# Altium PCB usbmodule.PcbDoc
Units mm, origin at the board's own origin, x right, y up, seen from the top; angles counter-clockwise.
Board outline 51.5 x 52.77 mm, 2 copper layers (Top Layer, Bottom Layer); 40 components, 39 nets, 247 pads, 56 vias.
Unrouted connection lines stored in the file: 72.
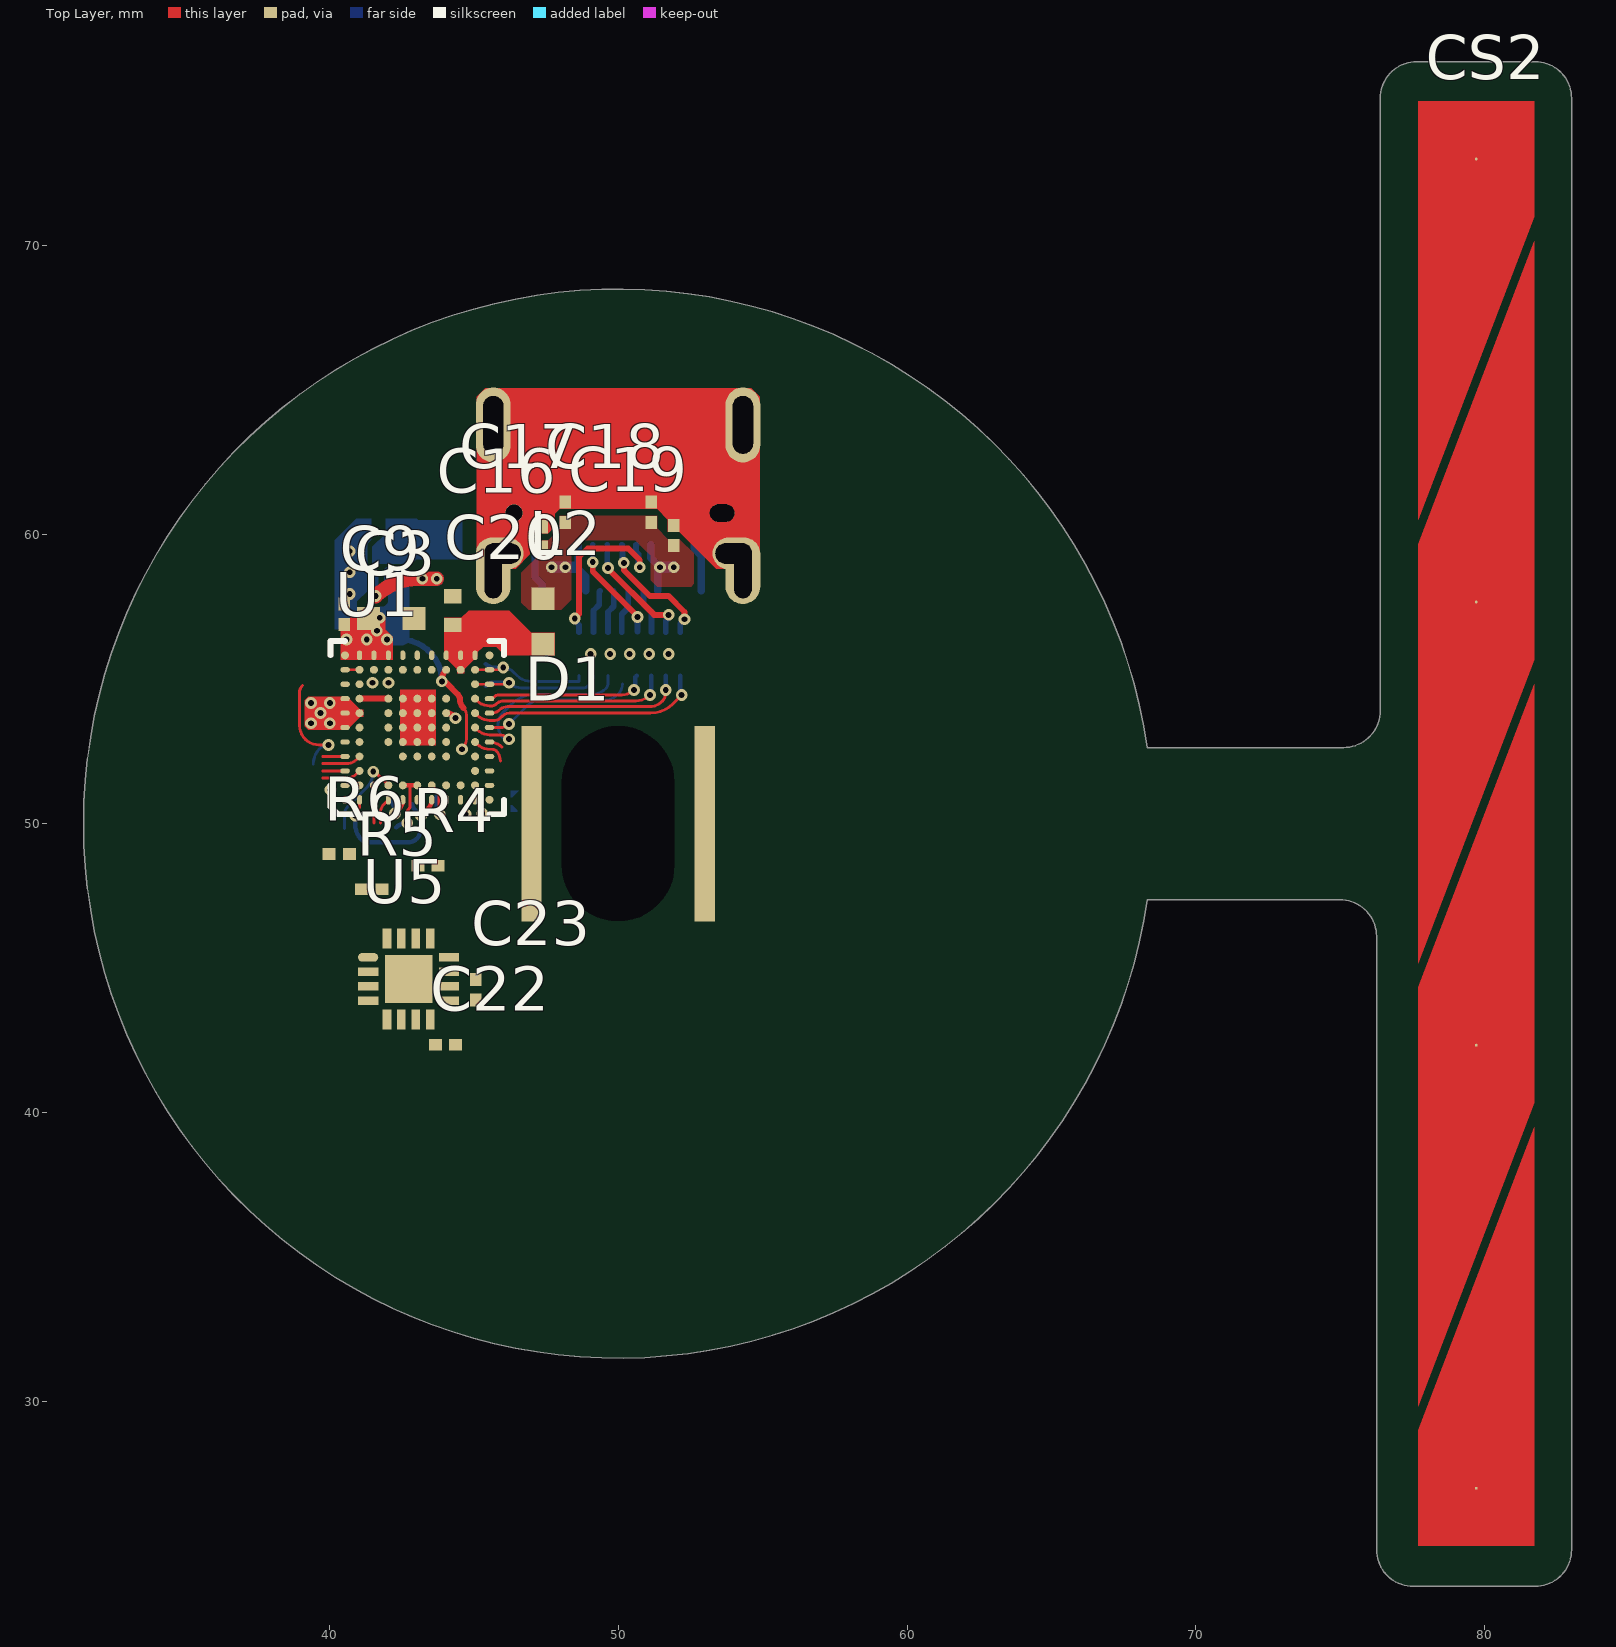
[diagram p0: Top Layer view]
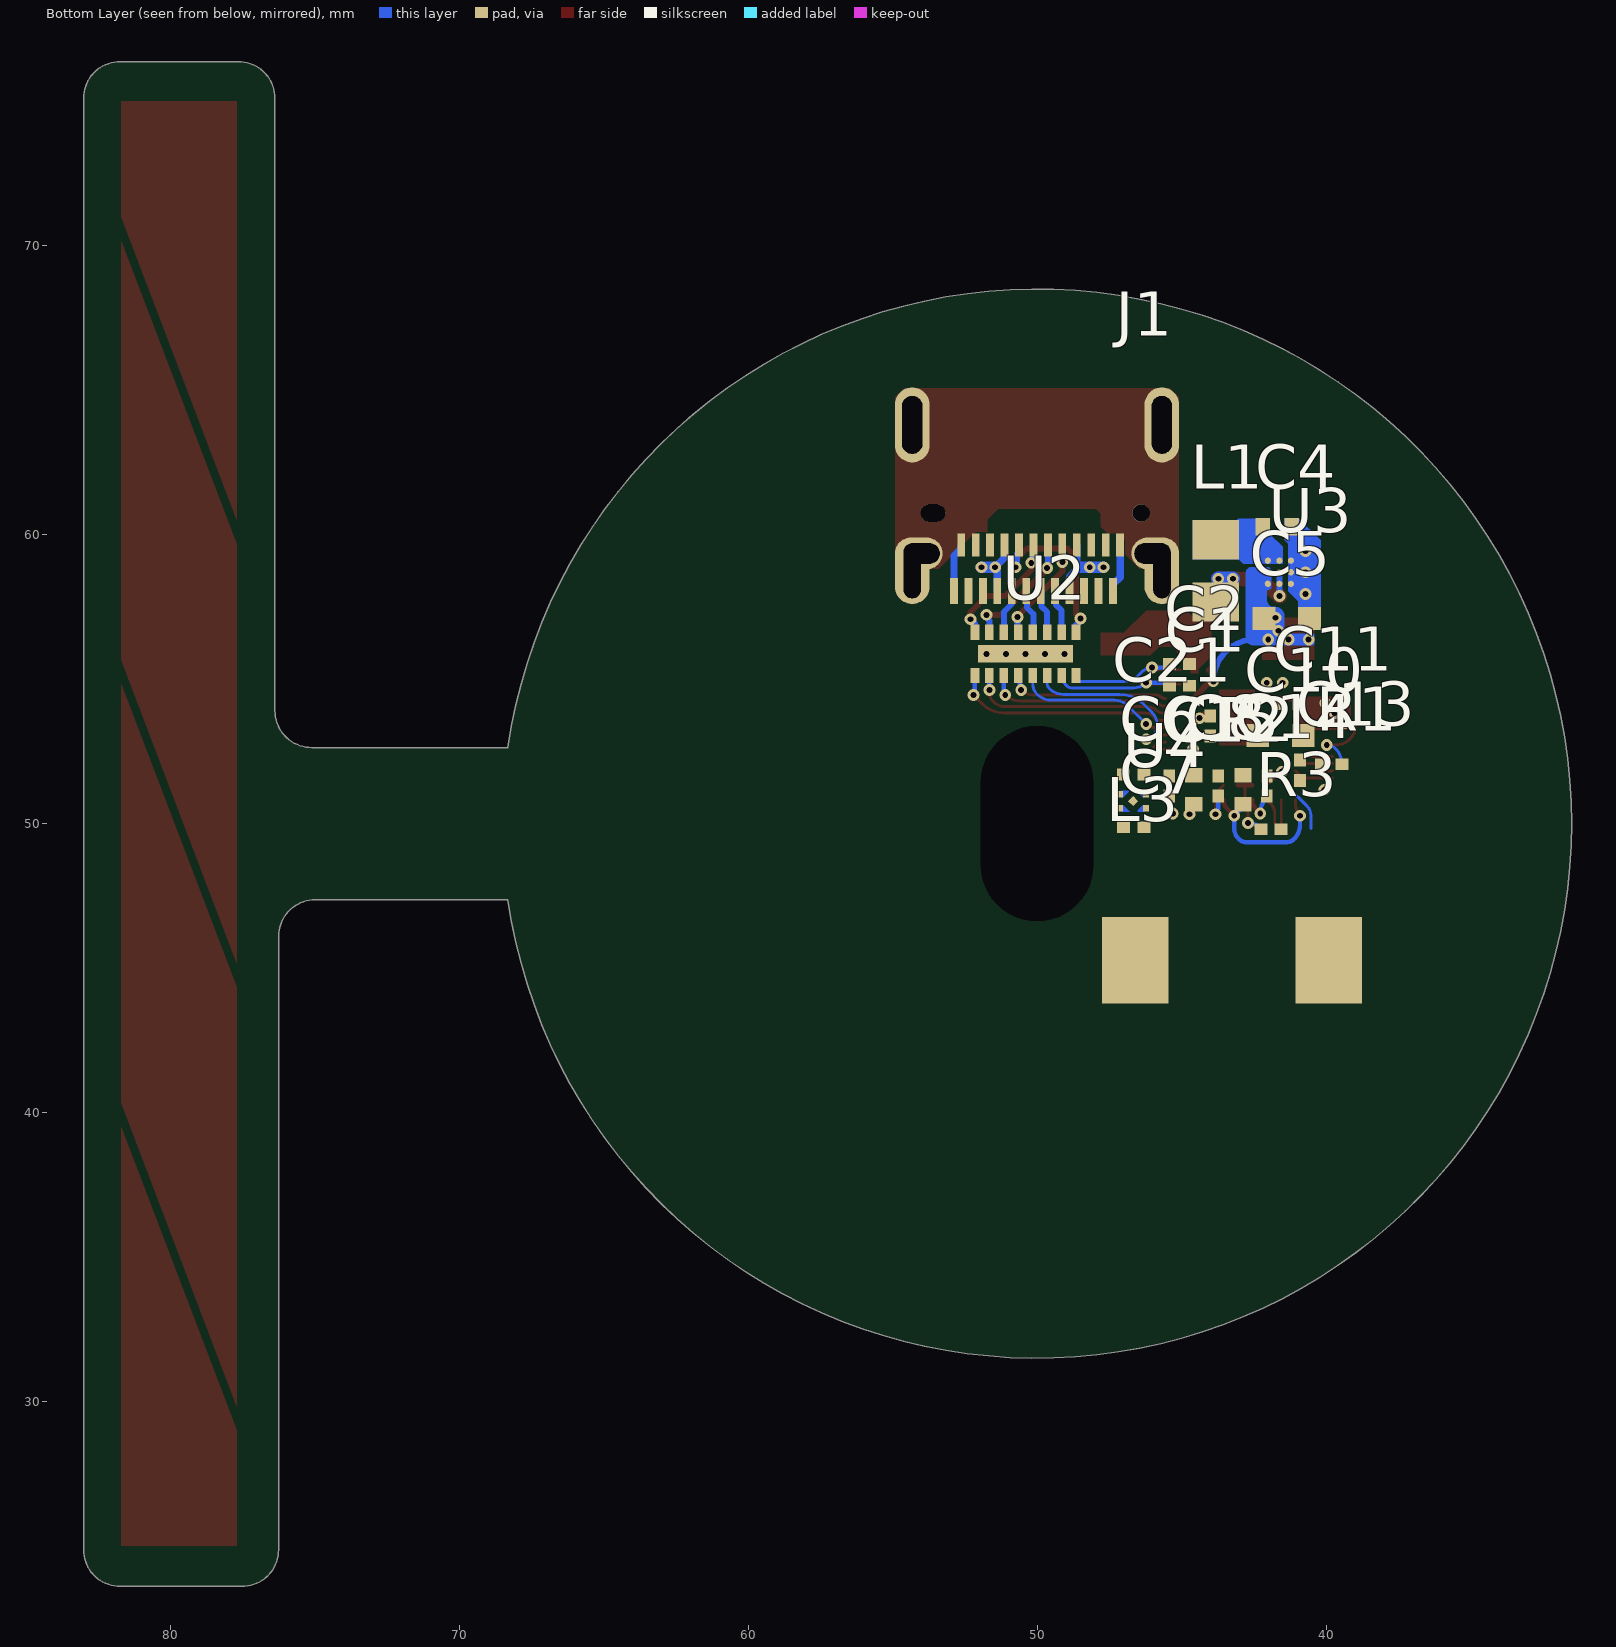
[diagram p1: Bottom Layer view, seen from below]

## Layer stack, top to bottom
Top Solder: solder mask 0.0102, Solder Resist, Dk 3.5
Top Layer: signal copper 0.0356
Dielectric1: dielectric 0.32, FR-4, Dk 4.8
Bottom Layer: signal copper 0.0356
Bottom Solder: solder mask 0.0102, Solder Resist, Dk 3.5

## Board outline
68.312,47.367 cw(c50,50) 68.312,52.633 68.323,52.635 75.105,52.635 ccw(c75.105,53.905) 76.375,53.905 76.375,75.105 cw(c77.645,75.105) 77.645,76.375 81.73,76.375 cw(c81.73,75.105) 83,75.105 83,24.87 cw(c81.73,24.87) 81.73,23.6 77.52,23.6 cw(c77.52,24.87) 76.25,24.87 76.25,46.095 ccw(c74.98,46.095) 74.98,47.365
board region main: 68.495,47.365 68.323,47.365 68.089,46.065 67.762,44.785 67.345,43.531 66.839,42.31 66.247,41.128 65.573,39.992 64.819,38.906 63.99,37.877 63.09,36.91 62.123,36.01 61.094,35.181 60.008,34.427 58.872,33.753 57.69,33.161 56.469,32.655 55.215,32.238 53.935,31.911 52.635,31.677 51.321,31.535 50,31.488 48.679,31.535 47.365,31.677 46.065,31.911 44.785,32.238 43.531,32.655 42.31,33.161 41.128,33.753 39.992,34.427 38.906,35.181 37.877,36.01 36.91,36.91 36.01,37.877 35.181,38.906 34.427,39.992 33.753,41.128 33.161,42.31 32.655,43.531 32.238,44.785 31.911,46.065 31.677,47.365 31.535,48.679 31.488,50 31.535,51.321 31.677,52.635 31.911,53.935 32.238,55.215 32.655,56.469 33.161,57.69 33.753,58.872 34.427,60.008 35.181,61.094 36.01,62.123 36.91,63.09 37.877,63.99 38.906,64.819 39.992,65.573 41.128,66.247 42.31,66.839 43.531,67.345 44.785,67.762 46.065,68.089 47.365,68.323 48.679,68.465 50,68.512 51.321,68.465 52.635,68.323 53.935,68.089 55.215,67.762 56.469,67.345 57.69,66.839 58.872,66.247 60.008,65.573 61.094,64.819 62.123,63.99 63.09,63.09 63.99,62.123 64.819,61.094 65.573,60.008 66.247,58.872 66.839,57.69 67.345,56.469 67.762,55.215 68.089,53.935 68.323,52.634 68.312,52.633 68.323,52.635 68.45,52.634
board region slider: 68.45,52.634 75.105,52.624 75.437,52.667 75.745,52.795 76.011,52.999 76.214,53.264 76.342,53.573 76.386,53.904 76.375,53.904 76.364,75.105 76.408,75.437 76.536,75.745 76.739,76.011 77.005,76.214 77.313,76.342 77.645,76.386 77.645,76.375 81.73,76.386 82.062,76.342 82.37,76.214 82.636,76.011 82.839,75.745 82.967,75.437 83.011,75.105 83,75.105 83.011,24.87 82.967,24.538 82.839,24.23 82.636,23.964 82.37,23.761 82.062,23.633 81.73,23.589 81.73,23.6 77.52,23.589 77.188,23.633 76.88,23.761 76.614,23.964 76.411,24.23 76.283,24.538 76.239,24.87 76.25,24.87 76.261,46.095 76.217,46.427 76.089,46.736 75.886,47.001 75.62,47.205 75.312,47.333 74.98,47.376 74.98,47.365 68.495,47.365

## Design rules (kind name [scope] priority, off if disabled: settings)
Clearance [All] p1: gap=0.102
PlaneConnect [All] p1: planeconnectstyle=Direct reliefexpansion=0.508 reliefentries=4 reliefconductorwidth=0.254 reliefairgap=0.254
PolygonConnect [All] p1: connectstyle=Direct reliefconductorwidth=0.254 reliefentries=4 polygonreliefangle="90 Angle" airgapwidth=0.254
RoutingVias [All] p1: holewidth=0.711 width=1.27 viastyle="Through Hole" minholewidth=0.711 minwidth=1.27 maxholewidth=0.711 maxwidth=1.27
SilkToSolderMaskClearance SilkscreenOverComponentPads [IsPad] p1: minsilkscreentomaskgap=0.254 clearancetoexposedcopper=TRUE
SolderMaskExpansion [All] p1: expansion=0.102
Width [All] p1: maxlimit=0.762 minlimit=0.102 preferedwidth=0.203
27 further rules are at their usual default settings.

## Classes and differential pairs
component class Battery: C4 C5 C6 C7 C22 C23 D1 L1 L3 U3 U4 U5
component class Main: C1 C2 C3 C8 C9 C10 C11 C12 C13 C14 C15 C16 C17 C18 C19 C20 C21 CS2 J1 L2 R1 R2 R3 R4 R5 R6 U1 U2

## Components (designator, comment, footprint, x,y, rotation, side; value= is the part's Value field where it differs from the comment)
C1 "Cap 220pF" "0201 (C)" 45.075,54.775 r0 bottom
C2 "Cap 220pF" "0201 (C)" 45.075,55.525 r0 bottom
C3 "Cap 22µF" "0603 (C)" 42.15,57.1 r180 top
C4 "Cap 10µF" "0402 (C)" 41.688,60.275 r180 bottom
C5 "Cap 22µF" "0603 (C)" 41.363,57.1 r180 bottom
C6 "Cap 100nF" "0201 (C)" 46.65,51.7 r180 bottom
C7 "Cap 100nF" "0201 (C)" 46.65,49.875 r0 bottom
C8 "Cap 10µF" "0402 (C)" 44.575,51.175 r270 bottom
C9 "Cap 100nF" "0201 (C)" 40.525,57.25 r90 top
C10 "Cap 10µF" "0603 (C)" 41.575,53.05 r180 bottom
C11 "Cap 100nF" "0201 (C)" 41.3,54.125 r180 bottom
C12 "Cap 1µF" "0201 (C)" 45.425,51.3 r270 bottom
C13 "Cap 1µF" "0201 (C)" 40.9,51.85 r270 bottom
C14 "Cap 10µF" "0402 (C)" 42.875,51.175 r270 bottom
C15 "Cap 1µF" "0201 (C)" 42.05,51.3 r90 bottom
C16 "Cap 10nF" "0201 (C)" 47.375,59.925 r270 top
C17 "Cap 10nF" "0201 (C)" 48.175,60.775 r270 top
C18 "Cap 10nF" "0201 (C)" 51.15,60.775 r270 top
C19 "Cap 10nF" "0201 (C)" 51.925,59.975 r270 top
C20 "Cap 1µF" "0402 (C)" 44.275,57.375 r270 top
C21 "Cap 220nF" "0201 (C)" 44,53.375 r90 bottom
C22 "Cap 100nF" "0201 (C)" 44.025,42.35 r180 top
C23 "Cap 100nF" "0201 (C)" 45.075,44.25 r270 top
CS2 "Medium QTouch Slider" ? 79.7,50 r90 top
D1 "XHP70" "XHP70 6V Slot" 50,50 r0 top
J1 "USB Type C" DX07S024JJ2 46.4,60.75 r0 bottom
L1 "L 470nH" "0806 (L)" 43.813,58.75 r90 bottom
L2 "FBMJ1608HS220NTR" "0603 (L)" 47.4,57 r270 top
L3 "L 6.8µH" "Inductor (8.4mm x 7.9mm)" 43.25,45.275 r180 bottom
R1 "Res 100k" "0201 (R)" 39.8,52.05 r180 bottom
R2 "Res 15k" "0201 (R)" 43.725,51.3 r90 bottom
R3 "Res 100k" "0201 (R)" 41.9,49.8 r0 bottom
R4 "Res 10k" "0201 (R)" 43.425,48.55 r0 top
R5 "Res 10k" "0201 (R)" 41.475,47.725 r0 top
R6 "Res 10k" "0201 (R)" 40.35,48.95 r0 top
U1 "TPS65982AAZQZR" ZQZ0096A_Oval 43.05,53.325 r90 top
U2 "CM1235" "WDFN-16 (4mmx1.7mm)" 50.4,55.875 r180 bottom
U3 "FAN48610UC50X" "WLCSP-6 (1.2mm x 1.2mm)" 41.613,58.7 r90 bottom
U4 "TCR2LN33" "SDFN-4 (0.8MM X 0.8MM)" 46.675,50.775 r90 bottom
U5 "5A Buck Regulator" "WQFN-16 (3mm x 3mm)" 41.35,45.375 r0 top

## Footprints (in the part's own frame and the unit in brackets; to place one, negate y for a bottom-side part, rotate by r counter-clockwise, add the part's x,y. Pads: shape width x height; smd on the part's side, far side on the other; paste and mask are expansions set on the pad)
"0201 (C)" [mm]
  rect 0.45x0.4 smd: 1(-0.35,0) 2(0.35,0)
  body extent -0.35,-0.15 0.35,0.15, height 0.3
"0201 (R)" [mm]
  rect 0.45x0.4 smd: 1(-0.35,0) 2(0.35,0)
  body extent -0.35,-0.15 0.35,0.15, height 0.3
"0402 (C)" [mm]
  rect 0.5x0.6 smd: 1(-0.5,0) 2(0.5,0)
  body extent -0.5,-0.25 0.5,0.25, height 0.41
"0603 (C)" [mil]
  rect 31x31 smd: 1(-31,0) 2(31,0)
  body extent -32,-16 32,16, height 32
"0603 (L)" [mil]
  rect 31x31 smd: 1(-31,0) 2(31,0)
  body extent -31,-16 32,16, height 31
"0806 (L)" [mm] "Chip Resistor, 2-Leads, Body 2.0x1.3mm, IPC Low Density"
  rect 1.35x1.6 smd: 1(-1.075,0) 2(1.075,0)
  body extent -1.07,-0.8 1.08,0.8, height 1
DX07S024JJ2 [mm]
  rect 0.27x0.9 smd: A1(0.975,2.7) A2(1.475,2.7) A3(1.975,2.7) A4(2.475,2.7) A5(2.975,2.7) A6(3.475,2.7) A7(3.975,2.7) A8(4.475,2.7) A9(4.975,2.7) A10(5.475,2.7) A11(5.975,2.7) A12(6.475,2.7)
  rect 0.27x0.8 smd: B1(6.225,1.1) B2(5.725,1.1) B3(5.225,1.1) B4(4.725,1.1) B5(4.225,1.1) B6(3.725,1.1) B7(3.225,1.1) B8(2.725,1.1) B9(2.225,1.1) B10(1.725,1.1) B11(1.225,1.1) B12(0.725,1.1)
  oval 1.65x1.1 hole 0.7 slot 1.25 at 0 deg copper offset 0.1,0: H1(7.595,1.4)
  oval 1.2x2.3 hole 0.6 slot 1.9 at 90 deg: H2(7.92,2) H4(-0.72,2)
  oval 1.65x1.1 hole 0.7 slot 1.25 at 0 deg copper offset -0.1,0: H3(-0.395,1.4)
  oval 1.2x2.6 hole 0.7 slot 2 at 90 deg: H5(7.92,-3.05) H6(-0.72,-3.05)
  oval 0.85x0.6 hole 0.6 slot 0.85 at 0 deg unplated: H7(7.2,0)
  round 0.6 hole 0.6 unplated: H8(0,0)
  Mechanical 1 keep-out region: -0.3,0.4 7.5,0.4 7.5,-4.85 -0.3,-4.85
"Inductor (8.4mm x 7.9mm)" [mm]
  rect 2.3x3 smd: 1(-3.35,0) 2(3.35,0)
  body extent -4.2,-3.95 4.2,3.95, height 7.2
"SDFN-4 (0.8MM X 0.8MM)" [mm]
  rect 0.225x0.2 smd mask+0.05: 1(-0.25,-0.45) 2(0.25,-0.45) 3(0.25,0.45) 4(-0.25,0.45)
  rect 0.25x0.25 smd rot 45 mask+0.05: PAD(0,0)
  Top Layer region: 0.363,0.387 0.138,0.387 0.138,0.337 0.362,0.113 0.363,0.113
  Top Layer region: -0.363,-0.388 -0.138,-0.388 -0.138,-0.337 -0.313,-0.163 -0.363,-0.163
  Top Layer region: -0.362,0.387 -0.137,0.387 -0.137,0.337 -0.362,0.113 -0.362,0.113
  Top Layer region: 0.362,-0.387 0.137,-0.387 0.137,-0.337 0.362,-0.113 0.362,-0.113
  body extent -0.4,-0.4 0.4,0.4, height 0.38
"WDFN-16 (4mmx1.7mm)" [mm]
  rect 0.3x0.525 smd: 1(-1.75,-0.75) 2(-1.25,-0.75) 3(-0.75,-0.75) 4(-0.25,-0.75) 5(0.25,-0.75) 6(0.75,-0.75) 7(1.25,-0.75) 8(1.75,-0.75) 9(1.75,0.75) 10(1.25,0.75) 11(0.75,0.75) 12(0.25,0.75) 13(-0.25,0.75) 14(-0.75,0.75) 15(-1.25,0.75) 16(-1.75,0.75)
  rect 3.3x0.6 smd: PAD(0,0)
  body extent -2,-0.85 2,0.85, height 0.8
"WLCSP-6 (1.2mm x 1.2mm)" [mm]
  round 0.215 smd mask+0.05: A1(-0.4,0.4) A2(0,0.4) A3(0.4,0.4) B1(-0.4,0) B2(0,0) B3(0.4,0) C1(-0.4,-0.4) C2(0,-0.4) C3(0.4,-0.4)
  body extent -0.63,-0.63 0.63,0.63, height 0.6
"WQFN-16 (3mm x 3mm)" [mm]
  oval 0.7x0.3 smd: 1(0,0)
  rect 0.7x0.3 smd: 2(0,-0.5) 3(0,-1) 4(0,-1.5) 9(2.8,-1.5) 10(2.8,-1) 11(2.8,-0.5) 12(2.8,0)
  rect 0.3x0.7 smd: 5(0.65,-2.15) 6(1.15,-2.15) 7(1.65,-2.15) 8(2.15,-2.15) 13(2.15,0.65) 14(1.65,0.65) 15(1.15,0.65) 16(0.65,0.65)
  rect 1.65x1.65 smd: PAD(1.4,-0.75)
  body extent -0.1,-2.25 2.9,0.75, height 0.8
"XHP70 6V Slot" [mm]
  rect 0.7x6.76 smd: A(-3,0) K(3,0)
  round 1.524 hole 3.9 slot 6.76 at 90 deg unplated: ""(0,0)
  body extent -3.5,-3.5 3.5,3.5, height 4.49
ZQZ0096A_Oval [mm] "BGA, 96-Leads, Body 6.0x6.0mm,  Pitch 0.50mm, oval outer pads"
  round 0.275 smd: A1(-2.5,2.5) A11(2.5,2.5) B2(-2,2) B3(-1.5,2) B4(-1,2) B5(-0.5,2) B6(0,2) B7(0.5,2) B8(1,2) B9(1.5,2) B10(2,2) C2(-2,1.5) C10(2,1.5) D2(-2,1) D5(-0.5,1) D6(0,1) D7(0.5,1) D8(1,1) D10(2,1) E2(-2,0.5) E4(-1,0.5) E5(-0.5,0.5) E6(0,0.5) E7(0.5,0.5) E8(1,0.5) E10(2,0.5) F2(-2,0) F4(-1,0) F5(-0.5,0) F6(0,0) F7(0.5,0) F8(1,0) F10(2,0) G2(-2,-0.5) G4(-1,-0.5) G5(-0.5,-0.5) G6(0,-0.5) G7(0.5,-0.5) G8(1,-0.5) G10(2,-0.5) H2(-2,-1) H4(-1,-1) H5(-0.5,-1) H6(0,-1) H7(0.5,-1) H8(1,-1) H10(2,-1) J2(-2,-1.5) J10(2,-1.5) K2(-2,-2) K3(-1.5,-2) K4(-1,-2) K5(-0.5,-2) K6(0,-2) K7(0.5,-2) K8(1,-2) K9(1.5,-2) K10(2,-2) L1(-2.5,-2.5) L11(2.5,-2.5)
  oval 0.178x0.33 smd: A2(-2,2.5) A3(-1.5,2.5) A4(-1,2.5) A5(-0.5,2.5) A6(0,2.5) A7(0.5,2.5) A8(1,2.5) A9(1.5,2.5) A10(2,2.5) L2(-2,-2.5) L3(-1.5,-2.5) L4(-1,-2.5) L5(-0.5,-2.5) L6(0,-2.5) L7(0.5,-2.5) L8(1,-2.5) L9(1.5,-2.5) L10(2,-2.5)
  oval 0.33x0.178 smd: B1(-2.5,2) B11(2.5,2) C1(-2.5,1.5) C11(2.5,1.5) D1(-2.5,1) D11(2.5,1) E1(-2.5,0.5) E11(2.5,0.5) F1(-2.5,0) F11(2.5,0) G1(-2.5,-0.5) G11(2.5,-0.5) H1(-2.5,-1) H11(2.5,-1) J1(-2.5,-1.5) J11(2.5,-1.5) K1(-2.5,-2) K11(2.5,-2)
  silkscreen extent -3,-3 3,3, body extent -3.05,-3.05 3.05,3.05, height 1.01
? [mm]
  round 0.1 smd paste-0.05: 1(-23,0) 1(23,0) 2(-7.667,0) 3(7.667,0)
  Top Layer region: 10.509,2 25,2 25,-2 21,-2 10.509,2 10.509,2
  Top Layer region: -4.825,2 9.667,2 20.158,-2 5.667,-2 -4.825,2 -4.825,2
  Top Layer region: -20.158,2 -5.667,2 4.825,-2 -9.667,-2 -20.158,2 -20.158,2
  Top Layer region: -25,2 -21,2 -10.509,-2 -25,-2 -25,2

## Part data
C1 C2: "Ceramic Capacitor 220pF"
C3 C5: "Ceramic Capacitor 22µF"
C4 C8 C10 C14: "Ceramic Capacitor 10µF"
C6 C7 C9 C11 C22 C23: "Ceramic Capacitor 100nF"
C12 C13 C15 C20: "Ceramic Capacitor 1µF"
C16 C17 C18 C19: "Ceramic Capacitor 10nF"
C21: "Ceramic Capacitor 220nF"
CS2: library part MediumQTouchSlider
D1: "High Power LED"
J1: library part DX07, "USB Type C Receptacle"
L1: "Inductor 470nH"
L2: "Ferrit Bead 7.5A"
L3: "Inductor 6.8µH"
R1 R3: "Resistor 100k"
R2: "Resistor 15k"
R4 R5 R6: "Resistor 10k"
U1: "TPS65982 Preview Specification, ZQZ0096A"
U2: "ESD Protection"
U3: "Boost Regulator 5V"
U4: "Low Dropout Regulator 3.3V, 200mA"
U5: library part RT8251

## Via types
v1: diameter 0.406, hole 0.203, Top Layer to Bottom Layer, 56 vias

## Nets (pads, with @x,y where several pads share a name; then routed paths per layer and width w, separated by ;. In a path a pad name is that pad's centre, name@x,y a point inside that pad or via, vN(x,y) a via of type N, cw(c..) or ccw(c..) an arc to the next point about the centre after c; other vN are vias at no path point)
+1.8V: C13.2 R1.1 U1.A2
  other v1: 40.05,51.175
+3.3V: C14.2 R4.2 R5.2 R6.2 U1.B1 U1.G1 | length 5.5
  Top Layer w0.102: v1(40.9,50.275) ccw(c40.538,50.637) 41.05,50.637 U1.B1
  Top Layer w0.152: v1(43.175,50.275) 43.426,50.526 ccw(c43.128,50.825) U1.G1
  Bottom Layer w0.152: v1(40.9,50.275) 40.9,49.958 ccw(c41.583,49.958) 41.1,49.475 ccw(c41.402,49.777) 41.402,49.35 42.723,49.35 ccw(c42.723,49.777) 43.025,49.475 ccw(c42.663,49.837) 43.175,49.837 v1(43.175,50.275) 42.946,50.504 cw(c43.116,50.675) C14.2
"BAT +3.3V": C7.1 C8.2 U1.H1 U4.1
  other v1: 44.725,50.325
"BAT +5V": C3.2 C5.1 C6.1 C9.1 U1.A11 U1.B11 U1.C11 U1.D11 U1.H10 U3.A1 U3.A2 U4.3 U4.4 | length 5.9
  Top Layer w0.102: v1(44.6,52.575) ccw(c44.238,52.937) 44.75,52.937 44.75,53.759 ccw(c44.409,53.759) 44.65,54
  Top Layer w0.203: U1.H10 ccw(c44.412,54.963) 43.9,54.963 v1(43.9,54.925) cw(c43.9,54.684) v1@44.07,54.855 ; v1@44.071,54.854 44.456,54.469 cw(c44.288,54.302) 44.525,54.302 ccw(c44.952,54.302) 44.65,54
  Bottom Layer w0.203: v1(42,56.375) 42.45,56.375 cw(c42.45,54.925) v1(43.9,54.925)
  other v1: 40.6,56.375 41.3,56.375 41.65,56.675 41.75,57.125
GND: C1.1 C2.1 C3.1 C4.2 C5.2 C6.2 C7.2 C8.1 C9.2 C10.1 C11.1 C12.1 C13.1 C14.1 C15.2 C16.1 C17.1 C18.1 C19.1 C20.1 C21.1 C22.1 J1.A1 J1.A12 J1.B1 J1.B12 J1.H1 J1.H2 J1.H3 J1.H4 J1.H5 J1.H6 J1.H7 J1.H8 R2.2 R3.1 U1.A1 U1.B8 U1.D5 U1.D6 U1.D8 U1.E4 U1.E5 U1.E6 U1.E7 U1.E8 U1.F1 U1.F5 U1.F6 U1.F7 U1.F8 U1.G5 U1.G6 U1.G7 U1.G8 U1.H4 U1.H5 U1.H8 U1.L1 U2.PAD U3.C1 U3.C2 U3.C3 U4.2 U4.PAD U5.4 U5.PAD | length 4.4
  Top Layer w0.203: U1.B8@41.075,54.325 U1.D8@42.075,54.325
  Bottom Layer w0.254: J1.B12 47.125,58.525 47.375,58.275 J1.A1 ; J1.B1 52.625,59.525 52.875,59.275 J1.A12
  other v1: 49.05,55.875 49.725,55.875 50.4,55.875 51.075,55.875 51.75,55.875 40.713,57.95 40.713,58.7 40.713,59.425
NetC1_2: C1.2 U1.K9 U1.L9 U2.7 | length 5.2
  Top Layer w0.102: U1.K9 U1.L9 46.104,54.825 ccw(c46.104,54.996) v1(46.225,54.875)
  Bottom Layer w0.102: v1(46.225,54.875) ccw(c46.647,55.297) 46.647,54.7 48.825,54.7 ccw(c48.825,54.881) 48.953,54.753 49.026,54.826 ccw(c48.727,55.125) U2.7
  Bottom Layer w0.152: C1.2 cw(c45.666,54.534) 45.666,54.875 v1(46.225,54.875)
NetC2_2: C2.2 U1.K10 U1.L10 U2.8 | length 4.6
  Top Layer w0.102: U1.K10 U1.L10 45.844,55.325 ccw(c45.844,55.581) v1(46.025,55.4)
  Bottom Layer w0.102: v1(46.025,55.4) cw(c46.025,54.917) 46.366,55.259 46.5,55.125 ccw(c46.983,55.608) 46.983,54.925 48.65,54.925 U2.8
  Bottom Layer w0.152: C2.2 ccw(c45.727,55.827) 45.727,55.4 v1(46.025,55.4)
NetC12_2: C12.2 U1.K1
  other v1: 45.3,50.35
NetC15_1: C15.1 U1.E1 | length 1
  Top Layer w0.152: v1@42.409,50.484 ccw(c42.067,50.825) U1.E1
  Bottom Layer w0.152: C15.1@42.028,50.947 cw(c41.43,50.35) v1(42.275,50.35)
NetC21_2: C21.2 U1.H7 | length 0.3
  Top Layer w0.203: U1.H7 cw(c44.05,53.463) v1@44.306,53.719
  other v1: 44.375,53.65
NetC22_2: C22.2 U5.8
NetC23_1: C23.1 L3.1 U5.10 U5.11 U5.12 U5.13 U5.14
NetC23_2: C23.2 U5.9
NetJ1_A5: J1.A5 U2.10 | length 1.5
  Bottom Layer w0.203: U2.10 49.15,57.375 49.349,57.574 49.349,58.024 J1.A5
NetJ1_A6: J1.A6 U2.11 | length 1.5
  Bottom Layer w0.203: U2.11 49.65,57.325 49.85,57.525 J1.A6@49.85,58.05
NetJ1_A7: J1.A7 U2.12 | length 1.5
  Bottom Layer w0.203: U2.12@50.125,56.625 50.125,57.25 50.35,57.475 J1.A7@50.35,58.05
NetJ1_A8: J1.A8 U2.14 | length 1.5
  Bottom Layer w0.203: J1.A8 50.875,57.6 51.15,57.325 U2.14
NetJ1_B5: J1.B5 U2.9 | length 6.2
  Top Layer w0.203: v1(48.5,57.1) 48.65,57.25 48.65,59.225 48.95,59.525 50.35,59.525 50.75,59.125 v1(50.75,58.875)
  Bottom Layer w0.203: v1(48.5,57.1) 48.5,57.025 48.65,56.875 U2.9 ; J1.B5@50.632,59.643 J1.B5 50.625,59.4 50.7,59.325 50.7,58.925 v1(50.75,58.875)
NetJ1_B6: J1.B6 U2.16 | length 4.3
  Top Layer w0.203: v1(50.2,59.025) 50.2,58.775 51.1,57.875 51.75,57.875 52.3,57.325 v1(52.3,57.075)
  Bottom Layer w0.203: J1.B6 50.15,59.625 v1@50.15,59.075 ; U2.16 52.15,56.925 v1(52.3,57.075)
NetJ1_B7: J1.B7 U2.15 | length 4.2
  Top Layer w0.203: v1(49.65,58.85) 49.65,58.822 51.247,57.225 v1(51.75,57.225)
  Bottom Layer w0.203: v1@49.625,58.875 J1.B7 ; U2.15 51.65,57.025 51.75,57.125 v1(51.75,57.225)
NetJ1_B8: J1.B8 U2.13 | length 3.6
  Top Layer w0.203: v1(49.125,59.05) 49.125,58.725 v1@50.675,57.175
  Bottom Layer w0.203: v1(49.125,59.05) J1.B8 ; U2.13@50.675,56.65 v1(50.675,57.15)
NetL1_1: L1.1 U3.B1 U3.B2 | length 3.6
  Top Layer w0.508: v1(41.613,57.875) cw(c43.061,56.426) 43.061,58.475 v1(43.225,58.475) v1(43.725,58.475)
  Bottom Layer w0.203: v1@41.613,57.825 v1(41.613,57.875) U3.B1 U3.B2
  Bottom Layer w0.508: v1(43.225,58.475) v1(43.725,58.475)
NetR1_2: R1.2 U1.F10 | length 3.7
  Top Layer w0.102: 39.075,54.775 ccw(c39.316,54.534) 38.975,54.534 38.975,53.4 ccw(c39.65,53.4) 39.65,52.725 v1(39.975,52.725)
  Bottom Layer w0.102: R1.2@39.45,52.055 cw(c40.222,52.055) 39.676,52.601 cw(c39.975,52.303) v1(39.975,52.725)
  other v1: 42.05,54.875
NetR2_1: R2.1 U1.G2 | length 1.7
  Top Layer w0.102: U1.G2 43.676,51.199 cw(c43.378,50.9) 43.8,50.9 43.8,50.385 ccw(c43.885,50.385) v1(43.825,50.325)
  Bottom Layer w0.152: R2.1 43.725,50.566 ccw(c44.066,50.566) v1(43.825,50.325)
NetR3_2: R3.2 U1.E2 U1.F2 | length 2.3
  Top Layer w0.102: v1(42.7,50.025) 42.7,50.379 cw(c42.871,50.379) 42.75,50.5 ccw(c42.629,50.621) 42.8,50.621 42.8,51.325
  Top Layer w0.152: U1.E2 42.8,51.325 U1.F2
  Bottom Layer w0.152: R3.2@42.316,49.866 cw(c42.7,49.482) v1(42.7,50.025)
NetR4_1: R4.1 U1.D2 | length 3.1
  Top Layer w0.102: v1(41.525,51.8) cw(c41.525,51.679) 41.61,51.765 U1.D2
  Bottom Layer w0.102: 40.525,49.825 40.525,50.3 cw(c40.947,50.3) 40.649,50.599 41.295,51.245 ccw(c40.74,51.8) v1(41.525,51.8)
NetR5_1: R5.1 U1.D1 | length 0.9
  Top Layer w0.102: 41.775,50.025 41.775,50.375 cw(c42.197,50.375) 41.899,50.674 U1.D1
NetR6_1: R6.1 U1.C1 | length 0.8
  Top Layer w0.102: 41.55,50.025 U1.C1
NetU1_K6: U1.K6 U2.6 | length 6.5
  Top Layer w0.102: U1.K6@45.123,53.252 ccw(c45.55,53.679) 45.55,53.075 45.863,53.075 cw(c45.863,52.563) v1(46.225,52.925)
  Bottom Layer w0.102: v1@46.05,52.925 cw(c46.533,53.408) 45.85,53.408 45.85,53.45 cw(c46.393,53.45) 46.009,53.834 46.3,54.125 cw(c47.145,53.28) 47.145,54.475 49.086,54.475 ccw(c49.086,55.172) 49.579,54.679 ccw(c49.409,54.85) 49.65,54.85 U2.6
NetU1_K7: U1.K7 U2.1 | length 8.1
  Top Layer w0.102: U1.K7 45.123,53.752 ccw(c45.55,54.179) 45.55,53.575 45.739,53.575 ccw(c45.739,53.836) 45.924,53.651 45.991,53.719 cw(c46.247,53.464) 46.247,53.825 51.125,53.825 ccw(c51.125,54.911) 51.893,54.143 v1(52.2,54.45)
  Bottom Layer w0.152: v1@52.15,54.5 U2.1
NetU1_K8: U1.K8 U2.3 | length 6.7
  Top Layer w0.102: U1.K8@45.123,54.252 ccw(c45.55,54.679) 45.55,54.075 45.611,54.075 ccw(c45.611,54.339) 45.798,54.152 cw(c46.034,53.916) 46.034,54.25 50.617,54.25 ccw(c50.617,54.933) v1(51.1,54.45)
  Bottom Layer w0.152: v1@51.15,54.5 U2.3
NetU1_L6: U1.L6 U2.5 | length 5.2
  Top Layer w0.102: U1.L6 45.925,53.325 ccw(c45.925,53.747) v1@46.224,53.449
  Bottom Layer w0.102: v1(46.225,53.45) 46.85,54.075 cw(c47.325,53.6) 47.325,54.272 49.509,54.272 ccw(c49.509,54.966) 50,54.475 ccw(c49.638,54.837) 50.15,54.837
NetU1_L7: U1.L7 U2.2 | length 7
  Top Layer w0.102: U1.L7 45.634,53.825 ccw(c45.634,54.166) 45.875,53.925 cw(c46.169,53.631) 46.169,54.047 51.079,54.047 ccw(c51.079,54.677) 51.525,54.231 ccw(c51.223,54.533) 51.65,54.533 v1(51.65,54.625)
  Bottom Layer w0.152: v1(51.65,54.625) U2.2
NetU1_L8: U1.L8 U2.4 | length 5.6
  Top Layer w0.102: U1.L8 ccw(c45.55,54.566) 45.721,54.396 cw(c45.859,54.257) 45.859,54.453 50.135,54.453 ccw(c50.135,55.04) v1(50.55,54.625)
  Bottom Layer w0.152: v1@50.6,54.675 50.6,55.075 U2.4
NetU5_7: U5.7
V_USB: C10.2 C11.2 U1.A6 U1.A7 U1.A8 U1.B7 U5.1 U5.2 U5.3 U5.15 U5.16
  other v1: 39.375,53.475 40.025,53.475 39.7,53.825 39.375,54.175 40.025,54.175
VBAT: C4.1 L1.2 U3.A3 U3.B3
VBUS: C16.2 C17.2 C18.2 C19.2 J1.A4 J1.A9 J1.B4 J1.B9 L2.1 | length 4.9
  Bottom Layer w0.254: 48.55,58.875 48.625,58.8 ; J1.B9 48.625,58.8 ; J1.A4 48.875,58.55 48.625,58.8 ; J1.B4 51.125,59.2 v1@51.375,58.95 ; J1.A9 v1@51.375,58.95 ; v1(51.45,58.875) v1@51.375,58.95
  Bottom Layer w0.406: v1(47.7,58.875) 48.55,58.875 ; v1(51.45,58.875) v1(51.925,58.875)
  other v1: 48.175,58.875
VBUS2: C20.2 L2.2 U1.A10 U1.B10 U1.H11 U1.J10 U1.J11 U1.K11 | length 0.5
  Top Layer w0.102: U1.A10 U1.B10
  other v1: 41.5,54.875
pads on no net: CS2.1 CS2.2 CS2.3 D1. D1.A D1.K J1.A2 J1.A3 J1.A10 J1.A11 J1.B2 J1.B3 J1.B10 J1.B11 L3.2 U1.A3 U1.A4 U1.A5 U1.A9 U1.B2 U1.B3 U1.B4 U1.B5 U1.B6 U1.B9 U1.C2 U1.C10 U1.D7 U1.D10 U1.E10 U1.E11 U1.F4 U1.F11 U1.G4 U1.G10 U1.G11 U1.H2 U1.H6 U1.J1 U1.J2 U1.K2 U1.K3 U1.K4 U1.K5 U1.L2 U1.L3 U1.L4 U1.L5 U1.L11 U5.5 U5.6
copper on no net: | length 5.7
  Top Layer w0.102: 39.779,51.575 40.6,51.575 ccw(c40.6,52.058) 40.941,51.716 41.05,51.825 ; 39.779,51.825 40.55,51.825 ; 39.779,52.075 40.6,52.075 ccw(c40.6,52.558) 40.941,52.216 ; 39.779,52.325 40.55,52.325 ; 45.123,52.752 ccw(c45.55,53.179) 45.55,52.575 45.644,52.575 cw(c45.644,52.379) 45.782,52.518 cw(c45.438,52.173) 45.925,52.173 ; 45.55,52.825 cw(c45.55,52.221) 45.977,52.648

## Polygon pours and split planes (outlines as drawn)
VBUS on Top Layer "Top Layer-No Net" (solid, pour order 2): 52.125,59.85 52.625,59.35 52.625,58.3 52.525,58.2 51.35,58.2 51.125,58.425 51.125,59.275 50.6,59.8 48.825,59.8 48.375,59.35 48.375,57.75 48.025,57.4 46.9,57.4 46.65,57.65 46.65,58.675 47.175,59.2 47.175,59.8 47.575,59.8 47.975,60.2 47.975,60.65 51.35,60.65 51.35,60.225 51.725,59.85

## Other copper
Top Layer:
  rectangle net GND: 42.45,52.7 43.7,54.65
  region net V_USB: 41.175,53.95 41.075,53.95 40.625,54.4 39.275,54.4 39.15,54.275 39.15,53.375 39.275,53.25 40.625,53.25 41.075,53.7 41.175,53.7
  region net "BAT +5V": 40.4,55.675 42.2,55.675 42.2,56.475 41.95,56.725 41.95,57.125 40.725,57.125 40.4,56.8
  region net VBUS2: 44.425,55.2 44.675,55.2 44.675,55.35 45.125,55.8 45.125,55.925 45.325,56.125 45.775,56.125 46.075,55.825 47.8,55.825 47.8,56.6 47,56.6 46.225,57.375 44.825,57.375 44.575,57.125 43.975,57.125 43.975,55.8 44.425,55.35
  region net GND: 46.45,58.825 46.95,59.325 46.95,59.825 47.175,60.05 47.575,60.05 47.8,60.275 47.8,60.725 47.975,60.9 51.35,60.9 51.725,60.525 51.725,60.1 52.125,60.1 53.4,58.825 54.9,58.825 54.9,64.775 54.6,65.075 45.4,65.075 45.1,64.775 45.1,58.825
Bottom Layer:
  region net VBAT: 41.5,59.575 41.963,60.038 41.963,60.55 43.038,60.55 43.088,60.5 44.613,60.5 44.613,59.15 43.013,59.15 42.863,59 41.5,59
  region net GND: 40.963,56.725 40.963,57.7 41.313,58.05 41.313,59.688 41.45,59.825 41.45,60.55 40.938,60.55 40.188,59.8 40.188,56.725
  region net "BAT +5V": 40.4,56.5 cw(c40.475,56.5) 40.475,56.575 41.3,56.575 ccw(c41.3,56.725) 41.45,56.725 41.45,57.2 cw(c41.75,57.2) 41.75,57.5 41.8,57.5 ccw(c41.8,57.75) 42.05,57.75 42.05,58.025 ccw(c41.975,58.025) 41.975,58.1 cw(c41.975,58.175) 41.9,58.175 41.9,58.75 cw(c42.025,58.75) 42.025,58.875 42.575,58.875 cw(c42.575,58.675) 42.775,58.675 42.775,56.425 cw(c42.525,56.425) 42.525,56.175 40.475,56.175 cw(c40.475,56.25) 40.4,56.25

## Silkscreen, mask and mechanical layers (free items; w line width, h text height)
Board Outline:
  lines w0.254: 39.5,47.25 39.5,52.75 ; 60.5,47.25 60.5,52.75 ; 68.312,47.367 cw(c50,50) 68.312,52.633 ; 68.323,47.365 74.98,47.365 cw(c74.98,46.095) 76.25,46.095 76.25,24.87 ccw(c77.52,24.87) 77.52,23.6 81.73,23.6 ccw(c81.73,24.87) 83,24.87 83,75.105 ccw(c81.73,75.105) 81.73,76.375 77.645,76.375 ccw(c77.645,75.105) 76.375,75.105 76.375,53.905 cw(c75.105,53.905) 75.105,52.635 68.323,52.635
Mechanical Drawing:
  circle w0.254: c50,50 r7
  circle w0.254: c50,50 r18.5
  lines w0.254: 43.519,52.745 40.5,54 ; 47.55,43.45 47.55,38.95 52.35,38.95 ; 47.6,56.6 47.6,61.1 ; 47.6,61.2 43.8,65 50,65 56.2,65 63.35,57.85 ; 52.4,61.1 47.6,61.1 ; 56.5,47.347 59.5,46.1 ; 63.3,57.8 59.5,54 59.5,46.1 ; 40.5,54 40.5,46 36.65,42.15 43.8,35 56.3,35 52.35,38.95 ; 40.5,54 47.6,61.1 ; 52.35,38.95 59.5,46.1

## Text inside footprints (layer, text, board x,y; h text height)
J1: Mechanical 1 "Board Edge" at 46.575,66 h0.25 r180